# Altium PCB Therm_Expand_PCB_BottomBoard.PcbDoc (part 1 of 2)
Units mil, origin at the board's own origin, x right, y up, seen from the top; angles counter-clockwise.
Board outline 2696 x 1978 mil, 2 copper layers (Top Layer, Bottom Layer); 37 components, 59 nets, 206 pads, 124 vias.
Unrouted connection lines stored in the file: 20.
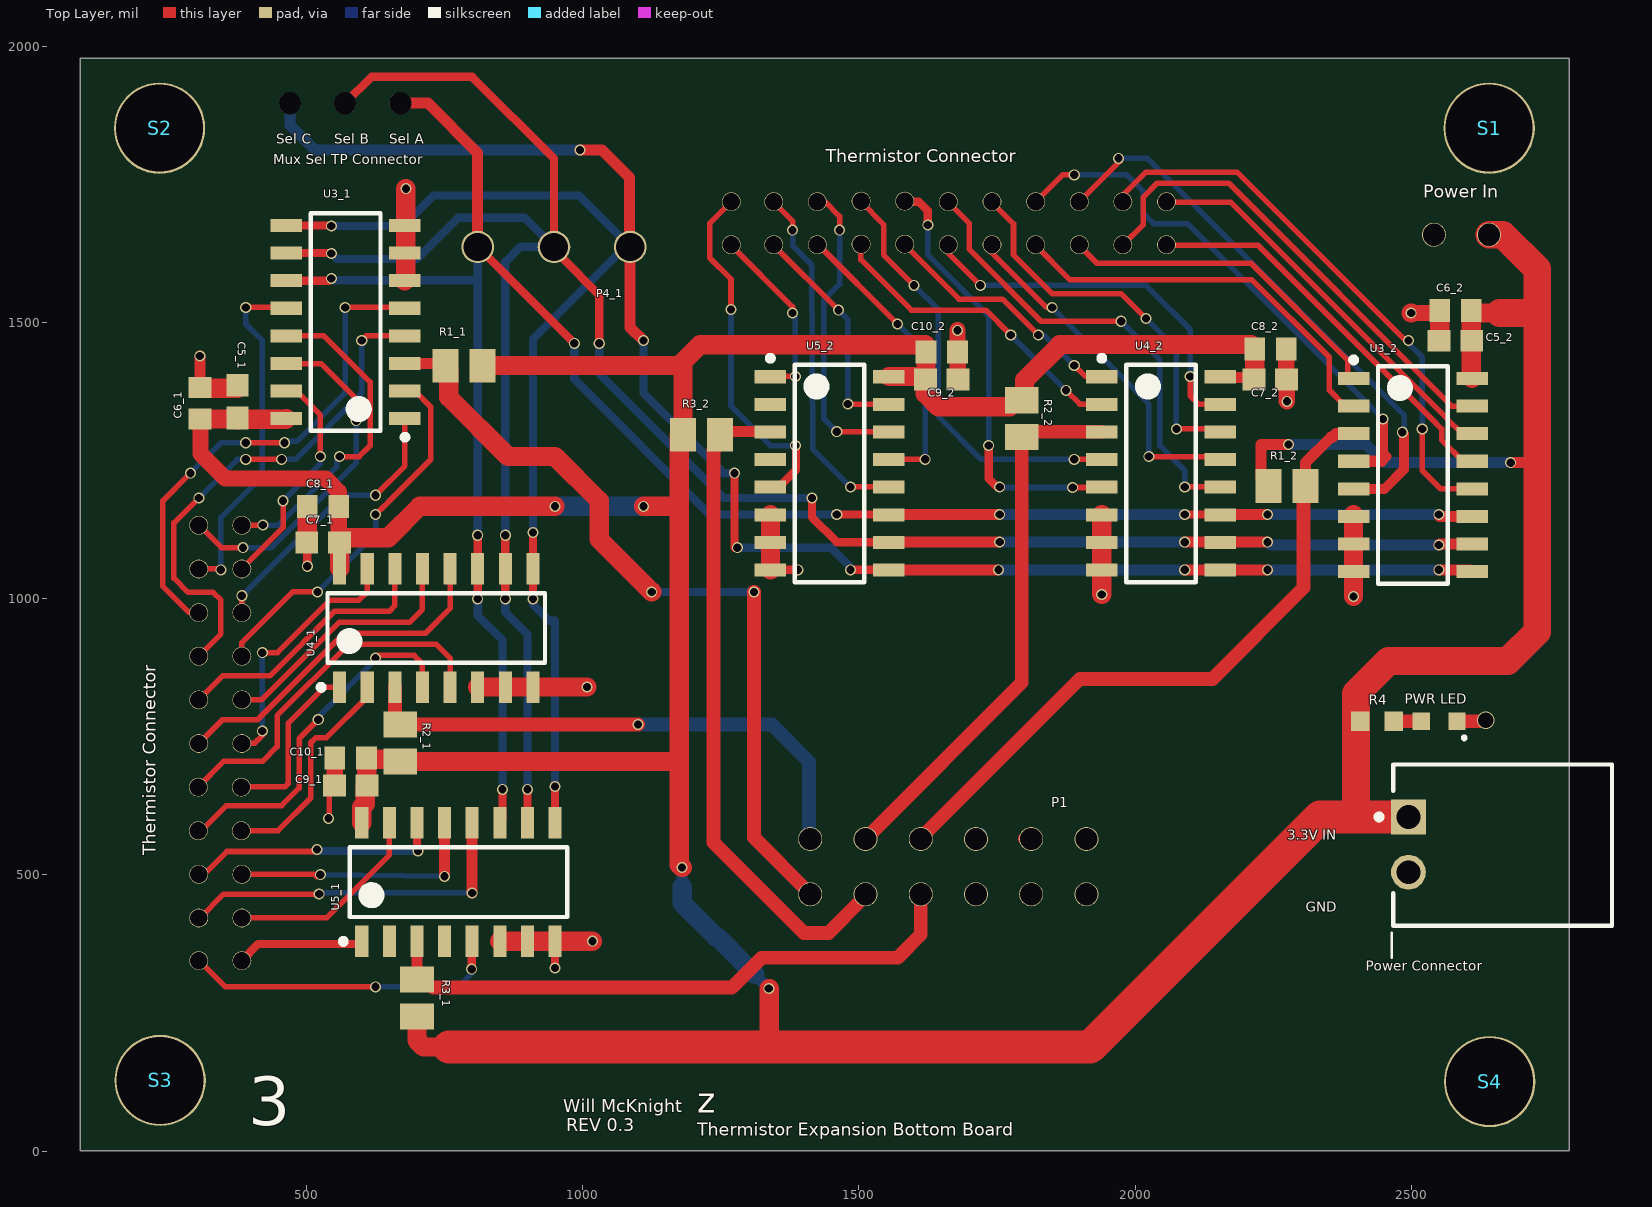
[diagram p0: Top Layer view]
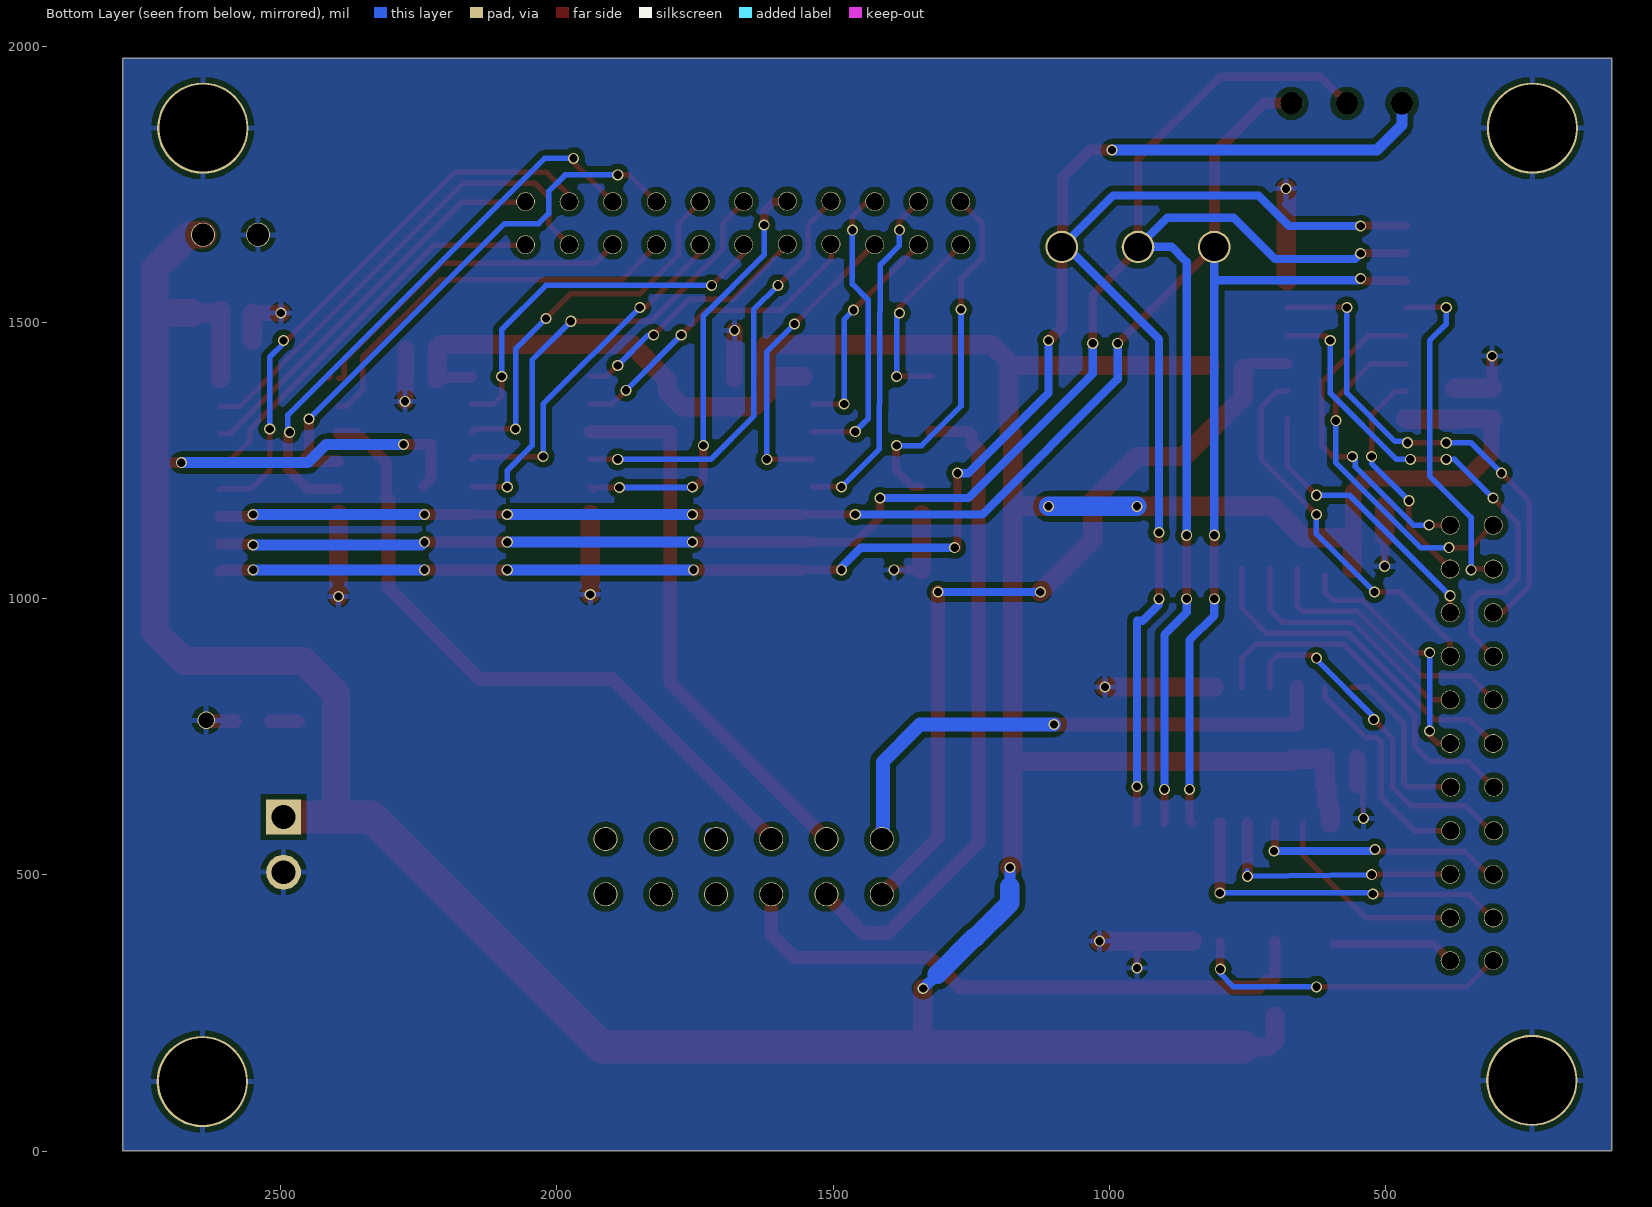
[diagram p1: Bottom Layer view, seen from below]

## Layer stack, top to bottom
Top Solder: solder mask 0.4, Solder Resist, Dk 3.5
Top Layer: signal copper 1.4
Dielectric 1: dielectric 12.6, FR-4, Dk 4.8
Bottom Layer: signal copper 1.4
Bottom Solder: solder mask 0.4, Solder Resist, Dk 3.5

## Board outline
90,1 2786,1 2786,1979 90,1979
cut-out: 2785,1977.45

## Design rules (kind name [scope] priority, off if disabled: settings)
Clearance [All] p1: gap=10 ignorepadtopadclearanceinfootprint=FALSE except(0: Arc-Hole Track-Hole SMDPad-Hole THPad-Hole Via-Hole Fill-Hole Poly-Hole Region-Hole Text-Hole; 5: Arc-Via Track-Via THPad-THPad; 6: Arc-Arc Arc-Track Track-Track)
PolygonConnect [All] p1: connectstyle=Relief reliefconductorwidth=10 reliefentries=4 polygonreliefangle="90 Angle" airgapwidth=10
RoutingVias [All] p1: holewidth=15 width=20 viastyle="Through Hole" minholewidth=12 minwidth=18 maxholewidth=28 maxwidth=32
ShortCircuit [All] p1: allowed=TRUE
SolderMaskExpansion [All] p1: expansion=4
Width [All] p1: maxlimit=100 minlimit=6 preferedwidth=15 minimp=50.000000 maximp=50.000000 favimp=50.000000
29 further rules are at their usual default settings.

## Classes and differential pairs
channel class Multiplexers: Data_TransferA_U_Single_Mux1 Data_TransferB_U_Single_Mux2
channel class MID: Data_TransferA Data_TransferB
channel class 50Pin_Connector: Data_TransferA_U_AHK50H-ND_THERM_CONNECTOR1 Data_TransferB_U_AHK50H-ND_THERM_CONNECTOR2
net class ADC_OUTC[1..2]: ADC_OUTC1 ADC_OUTC2
net class ADC_OUTB[1..2]: ADC_OUTB1 ADC_OUTB2
net class ADC_OUTA[1..2]: ADC_OUTA1 ADC_OUTA2
component class U_Data_Conversion: P1 R4 S1 S2 S3 S4
component class Data_TransferB_U_Single_Mux2: C5_2 C6_2 C7_2 C8_2 C9_2 C10_2 R1_2 R2_2 R3_2 U3_2 U4_2 U5_2
component class Data_TransferB_U_AHK50H-ND_THERM_CONNECTOR2: P2_2
component class Data_TransferA_U_Single_Mux1: C5_1 C6_1 C7_1 C8_1 C9_1 C10_1 P4_1 R1_1 R2_1 R3_1 U3_1 U4_1 U5_1
component class Data_TransferA_U_AHK50H-ND_THERM_CONNECTOR1: P2_1

## Components (designator, comment, footprint, x,y, rotation, side; value= is the part's Value field where it differs from the comment)
C5_1 "0.1uF" "0.1UF BYPASS CAPACITOR" 375,1357 r270 top (schematic designator C5)
C5_2 "0.1uF" "0.1UF BYPASS CAPACITOR" 2580,1467 r0 top (schematic designator C5)
C6_1 "1uF" 1UF_SAMSUNG 307,1354 r270 top (schematic designator C6)
C6_2 "1uF" 1UF_SAMSUNG 2580,1522 r0 top (schematic designator C6)
C7_1 "0.1uF" "0.1UF BYPASS CAPACITOR" 530,1102 r0 top (schematic designator C7)
C7_2 "0.1uF" "0.1UF BYPASS CAPACITOR" 2245,1397 r180 top (schematic designator C7)
C8_1 "1uF" 1UF_SAMSUNG 530,1167 r0 top (schematic designator C8)
C8_2 "1uF" 1UF_SAMSUNG 2245,1452 r180 top (schematic designator C8)
C9_1 "0.1uF" "0.1UF BYPASS CAPACITOR" 580,662 r0 top (schematic designator C9)
C9_2 "0.1uF" "0.1UF BYPASS CAPACITOR" 1650,1397 r180 top (schematic designator C9)
C10_1 "1uF" 1UF_SAMSUNG 580,712 r0 top (schematic designator C10)
C10_2 "1uF" 1UF_SAMSUNG 1650,1447 r180 top (schematic designator C10)
"Mux Sel TP Connector" "3 POS Mux Select Header" "Mux Select 3 Pos Header Pin" 670,1897 r180 top
P1 "12 POS ADC Header" "12 POS Dual Header" 1412,465 r0 top
P4_1 "Mux_Sel" 3-SCREW-TERMINAL-MUX-SELECT 1120,1616 r180 top (schematic designator P4)
"Power Connector" "2Pos Power Connector" "2POS POWER CONNECTOR" 2494,554 r90 top
"Power In" "2 Pos Power Header" "2 POS Power Header" 2641,1659 r180 top (schematic designator P6)
R1_1 "6.49kOhm SMD Resistor" RESC2012X06N 785,1422 r0 top (schematic designator R1)
R1_2 "6.49kOhm SMD Resistor" RESC2012X06N 2275,1204 r180 top (schematic designator R1)
R2_1 "6.49kOhm SMD Resistor" RESC2012X06N 670,739 r270 top (schematic designator R2)
R2_2 "6.49kOhm SMD Resistor" RESC2012X06N 1795,1326 r90 top (schematic designator R2)
R3_1 "6.49kOhm SMD Resistor" RESC2012X06N 700,277 r270 top (schematic designator R3)
R3_2 "6.49kOhm SMD Resistor" RESC2012X06N 1215,1297 r180 top (schematic designator R3)
R4 "Green" Green_LED_Resistor_90.9 2438,778 r180 top
S1 "#6-32 Standoff" "#6-32 Stand Off"#1 3045,3059 r0 top
S2 "#6-32 Standoff" "#6-32 Stand Off"#2 638,3059 r0 top
S3 "#6-32 Standoff" "#6-32 Stand Off"#3 639,1335 r0 top
S4 "#6-32 Standoff" "#6-32 Stand Off"#4 3046,1333 r0 top
"Thermistor Connector" "22-Pin-Connector" "22-PIN CONENCTOR" 15074,-11843 r0 top (schematic designator P2)
"Thermistor Connector" "22-Pin-Connector" "22-PIN CONENCTOR" 13867,14150 r90 top (schematic designator P2)
U3_1 "8:1 - MUX" SOP127P600X175 571,1501 r180 top (schematic designator U3)
U3_2 "8:1 - MUX" SOP127P600X175 2503,1224 r0 top (schematic designator U3)
U4_1 "8:1 - MUX" SOP127P600X175 735,947 r90 top (schematic designator U4)
U4_2 "8:1 - MUX" SOP127P600X175 2047,1227 r0 top (schematic designator U4)
U5_1 "8:1 - MUX" SOP127P600X175 775,487 r90 top (schematic designator U5)
U5_2 "8:1 - MUX" SOP127P600X175 1447,1227 r0 top (schematic designator U5)
? "LED" GREEN_SMD_LED 2929,714 r180 top

## Footprints (in the part's own frame and the unit in brackets; to place one, negate y for a bottom-side part, rotate by r counter-clockwise, add the part's x,y. Pads: shape width x height; smd on the part's side, far side on the other; paste and mask are expansions set on the pad)
"0.1UF BYPASS CAPACITOR" [mm] "Chip Capacitor, 2-Leads, Body 1.60x0.80mm, IPC Medium Density"
  rect 1.05x1 smd: 1(-0.75,0) 2(0.75,0)
  body extent -0.87,-0.48 0.87,0.48, height 0.9
1UF_SAMSUNG [mm]
  rect 0.95x1.05 smd: 1(-0.725,0) 2(0.725,0)
  body extent -0.85,-0.45 0.85,0.45, height 0.9
"2 POS Power Header" [mm] "Connecting Power between boards"
  round 1.1 hole 1.02: 1(0,0) 2(2.54,0)
  body extent -1.54,-1.3 3.92,1.24, height 10.04
"2POS POWER CONNECTOR" [mm]
  rect 1.6x1.6 hole 1.09: 1(1.295,-0.025)
  round 1.6 hole 1.09: 2(-1.245,-0.025)
  silkscreen extent -3.71,-9.38 3.71,1.45, body extent -3.66,-12.91 3.71,0.67, height 6.98
3-SCREW-TERMINAL-MUX-SELECT [mm]
  round 1.5 hole 1.3: 1(0.864,-0.533) 2(4.369,-0.533) 3(7.874,-0.533)
  body extent -1.43,-4.08 10.07,2.92, height 8.5
"12 POS Dual Header" [mm] "Board to Board ADC Channel Header"
  round 1.1 hole 1.02: 1(0,0) 2(0,2.54) 3(2.54,2.54) 4(2.54,0) 5(5.08,0) 6(5.08,2.54) 7(7.62,2.54) 8(7.62,0) 9(10.16,0) 10(10.16,2.54) 11(12.7,2.54) 12(12.7,0)
  body extent -1.27,-3.18 13.97,4.7, height 20.46
"22-PIN CONENCTOR" [mil]
  round 34 hole 31.5: 1(-13017,13484) 2(-13017,13562) 3(-13096,13484) 4(-13096,13562) 5(-13175,13484) 6(-13175,13562) 7(-13254,13484) 8(-13254,13562) 9(-13333,13484) 10(-13333,13562) 11(-13412,13484) 12(-13412,13562) 13(-13491,13485) 14(-13491,13563) 15(-13570,13485) 16(-13570,13563) 17(-13649,13484) 18(-13649,13562) 19(-13728,13484) 20(-13728,13562) 22(-13805,13562) 51(-13805,13484)
  body extent -13883,13472 -12939,13866, height 199
"#6-32 Stand Off"#1 [mm]
  round 4.2 hole 4: S1(-10.262,-30.658)
  body extent -13.92,-33.83 -6.6,-27.48, height 10.32
"#6-32 Stand Off"#2 [mm]
  round 4.2 hole 4: S2(-10.262,-30.658)
  body extent -13.92,-33.83 -6.6,-27.48, height 10.32
"#6-32 Stand Off"#3 [mm]
  round 4.2 hole 4: S3(-10.262,-30.658)
  body extent -13.92,-33.83 -6.6,-27.48, height 10.32
"#6-32 Stand Off"#4 [mm]
  round 4.2 hole 4: S4(-10.262,-30.658)
  body extent -13.92,-33.83 -6.6,-27.48, height 10.32
Green_LED_Resistor_90.9 [mm]
  rect 0.85x0.9 smd: 1(-0.775,0) 2(0.775,0)
  body extent -0.85,-0.45 0.85,0.45, height 0.55
GREEN_SMD_LED [mil]
  rect 31.5x31.5 smd: 1(346,-64) 2(411,-64)
  silkscreen extent 332,-35 334,-33, body extent 346,-79 410,-48, height 28
"Mux Select 3 Pos Header Pin" [mm]
  round 1 hole 1.02: 1(0,0) 2(2.54,0) 3(5.08,0)
  body extent -1.19,-7.26 6.43,1.24, height 5.77
RESC2012X06N [mm] "Chip Resistor, 2-Leads, Body 2.00x1.25mm, IPC Medium Density"
  rect 1.2x1.55 smd: 1(-0.85,0) 2(0.85,0)
  body extent -1.1,-0.58 1.1,0.58, height 0.6
SOP127P600X175 [mm] "SOP, 16-Leads, Body 9.90x3.90mm, Pitch 1.27mm, IPC Medium Density"
  rect 1.45x0.6 smd: 1(-2.725,4.445) 2(-2.725,3.175) 3(-2.725,1.905) 4(-2.725,0.635) 5(-2.725,-0.635) 6(-2.725,-1.905) 7(-2.725,-3.175) 8(-2.725,-4.445) 9(2.725,-4.445) 10(2.725,-3.175) 11(2.725,-1.905) 12(2.725,-0.635) 13(2.725,0.635) 14(2.725,1.905) 15(2.725,3.175) 16(2.725,4.445)
  silkscreen extent -2.85,-5 1.6,5.42, body extent -3,-5 3,5, height 1.75

## Part data
C5_1 C5_2 C7_1 C7_2 C9_1 C9_2: library part "0.1uF Cap", "0.1uF Bypass Cap", Case/Package=0603, Case Code (Metric)=1608, Dielectric=X7R, Dielectric Material=Ceramic, Manufacturer=KEMET, Manufacturer Part Number=C0603C104K9RACTU, Max Operating Temperature=125°C, Min Operating Temperature=-55°C, Package Quantity=4000, Supplier Part Number 1=399-15351-1-ND, Tolerance=10%, Voltage Rating=6.3V, Case Code (Imperial)=0603, ComponentLink1Description=https://datasheet.ciiva.com/13371/kem-c1002-x7r-smd-357932-13371879.pdf?src-supplier=Mouser, ComponentLink1URL=https://datasheet.ciiva.com/13371/kem-c1002-x7r-smd-357932-13371879.pdf?src-supplier=Mouser, Dissipation Factor=5%, Height=0.8mm, Length=1.6mm, Mount="Surface Mount", Packaging="Tape and Reel", Pricing 1="1=0.19000, 10=0.13800, 100=0.06480, 500=0.04546, 1000=0.03763 (USD)", RoHS=Yes, Stock 1=758, Supplier 1=Digi-Key, Termination=SMD/SMT, Thickness=0.034inch, Voltage Rating (DC)=6.3V, Width=0.8mm
C6_1 C6_2 C10_1 C10_2: library part "1uF Samsung Cap", "1uF Samsung Cap", Case/Package=0603, Case Code (Metric)=1608, Dielectric=X7R, Manufacturer=Samsung, Manufacturer Part Number=CL10B105KP8NNNC, Max Operating Temperature=125°C, Min Operating Temperature=-55°C, Package Quantity=1, Supplier Part Number 1=1276-1946-1-ND, Tolerance=10%, Voltage Rating=10V, Capacitance=1uF, Case Code (Imperial)=0603, ComponentLink1Description=https://media.digikey.com/pdf/Data%20Sheets/Samsung%20PDFs/CL_Series_MLCC_ds.pdf?src-supplier=Digi-Key, ComponentLink1URL=https://media.digikey.com/pdf/Data%20Sheets/Samsung%20PDFs/CL_Series_MLCC_ds.pdf?src-supplier=Digi-Key, ComponentLink2Description=http://www1.futureelectronics.com/doc/SAMSUNG/CL10B105KP8NNNC.pdf?src-supplier=Future+Electronics, ComponentLink2URL=http://www1.futureelectronics.com/doc/SAMSUNG/CL10B105KP8NNNC.pdf?src-supplier=Future+Electronics, ComponentLink3Description=https://www.verical.com/server-webapp/html/getDatasheet?partID=358410&src-supplier=Verical, ComponentLink3URL=https://www.verical.com/server-webapp/html/getDatasheet?partID=358410&src-supplier=Verical, Contact Plating=Tin, Depth=0.8mm, Height=0.8mm, Lead Free="Lead Free", Length=1.6mm, Mount="Surface Mount", Packaging="Tape and Reel", Pricing 1="1=0.1, 10=0.052, 100=0.0233, 500=0.0166, 1000=0.0131 (USD)", Radiation Hardening=No, Stock 1=10781730, Supplier 1=Digi-Key, Thickness=0.035inch, Voltage Rating (DC)=10V, Width=0.031inch
C8_1 C8_2: library part "1uF Samsung Cap", "1uF Samsung Cap", Case/Package=0603, Case Code (Metric)=1608, Dielectric=X7R, Manufacturer=Samsung, Manufacturer Part Number=CL10B105KP8NNNC, Max Operating Temperature=125°C, Min Operating Temperature=-55°C, Package Quantity=1, Supplier Part Number 1=1276-1946-1-ND, Tolerance=10%, Voltage Rating (DC)=10V, Capacitance=1uF, Case Code (Imperial)=0603, ComponentLink1Description=https://media.digikey.com/pdf/Data%20Sheets/Samsung%20PDFs/CL_Series_MLCC_ds.pdf?src-supplier=Digi-Key, ComponentLink1URL=https://media.digikey.com/pdf/Data%20Sheets/Samsung%20PDFs/CL_Series_MLCC_ds.pdf?src-supplier=Digi-Key, ComponentLink2Description=http://www1.futureelectronics.com/doc/SAMSUNG/CL10B105KP8NNNC.pdf?src-supplier=Future+Electronics, ComponentLink2URL=http://www1.futureelectronics.com/doc/SAMSUNG/CL10B105KP8NNNC.pdf?src-supplier=Future+Electronics, ComponentLink3Description=https://www.verical.com/server-webapp/html/getDatasheet?partID=358410&src-supplier=Verical, ComponentLink3URL=https://www.verical.com/server-webapp/html/getDatasheet?partID=358410&src-supplier=Verical, Contact Plating=Tin, Depth=0.8mm, Height=0.8mm, Lead Free="Lead Free", Length=1.6mm, Mount="Surface Mount", Packaging="Tape and Reel", Pricing 1="1=0.1, 10=0.052, 100=0.0233, 500=0.0166, 1000=0.0131 (USD)", Radiation Hardening=No, Stock 1=10781730, Supplier 1=Digi-Key, Thickness=0.035inch, Width=0.031inch
"Mux Sel TP Connector": Supplier Part Number 1=2057-PH1RA-03-UA-ND, Supplier 1=Digi-Key
P1: "Interboard connector for thermistors connecting to ADC", Color=Black, Manufacturer=3M, Manufacturer Part Number=929715-06-06-EU, Package Quantity=500, Supplier Part Number 1=3M156375-12-ND, ComponentLink1Description=http://www.mouser.com/ds/2/1/ts0769-35914.pdf?src-supplier=Mouser, ComponentLink1URL=http://www.mouser.com/ds/2/1/ts0769-35914.pdf?src-supplier=Mouser, ComponentLink2Description=http://components.arrow.com/part/dataview/42715320S8912076N3321?src-supplier=Arrow, ComponentLink2URL=http://components.arrow.com/part/dataview/42715320S8912076N3321?src-supplier=Arrow, ComponentLink3Description=http://multimedia.3m.com/mws/mediawebserver?66666UuZjcFSLXTtmXME5x46EVuQEcuZgVs6EVs6E666666--?src-supplier=Digi-Key, ComponentLink3URL=http://multimedia.3m.com/mws/mediawebserver?66666UuZjcFSLXTtmXME5x46EVuQEcuZgVs6EVs6E666666--?src-supplier=Digi-Key, Connector Type="Male Pin", Contact Mating Length=0.318inch, Contact Plating=Gold, Gender=Male, Mount="Through Hole", Number of Positions=12, Number of Rows=2, Packaging=Bulk, Pitch=0.1inch, Pricing 1="1=1.86000, 10=1.69000, 25=1.58600, 50=1.51720, 100=1.44820, 250=1.31024, 500=1.20680 (USD)", RoHS=Yes, Row Spacing=0.1inch, Stock 1=0, Supplier 1=Digi-Key, Termination=Solder
P4_1: library part 3-Screw-Terminal-Mux-Select, "Mux Select", Color=Blue, Current Rating=10A, Manufacturer="Wurth Electronics", Manufacturer Part Number=691103110003, Supplier Part Number 1=732-2746-ND, Voltage Rating=125V, ComponentLink1Description=http://www.farnell.com/datasheets/1442217.pdf?src-supplier=Element14, ComponentLink1URL=http://www.farnell.com/datasheets/1442217.pdf?src-supplier=Element14, Contact Material=Brass, Height=12.2mm, Housing Material=Nylon, Length=7mm, Number of Contacts=3, Number of Levels=1, Number of Positions Per Level=3, Pitch=0.138inch, Pricing 1="1=1.1, 10=0.986, 50=0.851, 100=0.762, 500=0.717, 980=0.672 (USD)", REACH SVHC=Unknown, Stock 1=617, Stripping Length=-6mm, Supplier 1=Digi-Key, Termination=Screw, Width=11.5mm, Wire/Cable Gauge=26AWG
"Power Connector": "Headers & Wire Housings R/A HDR 2P low profile single", Color=Black, Contact Resistance=30mR, Current Rating=3A, Flammability Rating="UL94 V-0", Insulation Resistance=1GR, Manufacturer=Molex, Manufacturer Part Number=70553-0001, Max Operating Temperature=105°C, Min Operating Temperature=-40°C, Package Quantity=2880, Supplier Part Number 1=WM4900-ND, Voltage Rating=250V, Approvals=UL, ComponentLink1Description=https://datasheet.ciiva.com/5158/0705530001-pcb-headers-172944-5158768.pdf?src-supplier=Mouser, ComponentLink1URL=https://datasheet.ciiva.com/5158/0705530001-pcb-headers-172944-5158768.pdf?src-supplier=Mouser, ComponentLink2Description=https://datasheet.ciiva.com/11746/0900766b80d8d649-11746625.pdf?src-supplier=RSComponents, ComponentLink2URL=https://datasheet.ciiva.com/11746/0900766b80d8d649-11746625.pdf?src-supplier=RSComponents, ComponentLink3Description=https://datasheet.ciiva.com/16657/0705530001-pcb-headers-16657777.pdf?src-supplier=Avnet+Europe, ComponentLink3URL=https://datasheet.ciiva.com/16657/0705530001-pcb-headers-16657777.pdf?src-supplier=Avnet+Europe, ComponentLink4Description=https://datasheet.ciiva.com/7920/ps-70541-7920854.pdf?src-supplier=Element14, ComponentLink4URL=https://datasheet.ciiva.com/7920/ps-70541-7920854.pdf?src-supplier=Element14, ComponentLink5Description=https://datasheet.ciiva.com/30195/179180705530001-pcb-headers-30195548.pdf?src-supplier=Onlinecomponents.com, ComponentLink5URL=https://datasheet.ciiva.com/30195/179180705530001-pcb-headers-30195548.pdf?src-supplier=Onlinecomponents.com, ComponentLink6Description=https://datasheet.ciiva.com/1438/1887076-1438989.pdf?src-supplier=Element14, ComponentLink6URL=https://datasheet.ciiva.com/1438/1887076-1438989.pdf?src-supplier=Element14, ComponentLink7Description=https://datasheet.ciiva.com/10090/0705530001-pcb-headers-10090317.pdf?src-supplier=Avnet, ComponentLink7URL=https://datasheet.ciiva.com/10090/0705530001-pcb-headers-10090317.pdf?src-supplier=Avnet, Contact Material=Bronze, Contact Plating=Gold, ELV=Compliant, Gender=Male, Glow Wire Compliant=Non-compliant, Housing Color=Black, Housing Material=Thermoplastic, Lead Free="Lead Free", Material=Brass, Mount="Through Hole", Number of Circuits=2, Number of Contacts=2, Number of Positions=2, Number of Rows=1, Orientation="Right Angle", Packaging=Rail/Tube, Pitch=2.54mm, Pricing 1="1=0.71000, 72=0.53486, 144=0.51264, 504=0.44575, 1008=0.36775, 5040=0.32318, 10008=0.30089 (USD)", Radiation Hardening=No, REACH SVHC=Unknown, RoHS=Yes, Stock 1=8671, Supplier 1=Digi-Key, Termination="Through Hole", Voltage Rating (DC)=250V
"Power In": Color=Black, Current Rating=2.5A, Manufacturer=3M, Manufacturer Part Number=929715-06-01-EU, Max Operating Temperature=105°C, Min Operating Temperature=-40°C, Package Quantity=1000, Supplier Part Number 1=3M156375-02-ND, ComponentLink1Description=https://datasheet.ciiva.com/5147/ts0769-35914-5147696.pdf?src-supplier=Mouser, ComponentLink1URL=https://datasheet.ciiva.com/5147/ts0769-35914-5147696.pdf?src-supplier=Mouser, ComponentLink2Description=https://datasheet.ciiva.com/6818/ts0769-6818155.pdf?src-supplier=Digi-Key, ComponentLink2URL=https://datasheet.ciiva.com/6818/ts0769-6818155.pdf?src-supplier=Digi-Key, Connector Type="Male Pin", Contact Gender=Male, Contact Material="Copper Alloy", Contact Mating Length=0.318inch, Contact Plating=Gold, Gender=Male, Housing Material=Polycyclohexylenedimethylene, Mount="Through Hole", Number of Positions=2, Number of Rows=2, Packaging=Bulk, Pitch=2.54mm, Pricing 1="1=0.43000, 10=0.40200, 25=0.34480, 50=0.29300, 100=0.28160, 250=0.25284, 500=0.24136 (USD)", RoHS=Yes, Row Spacing=0.1inch, Stock 1=0, Supplier 1=Digi-Key, Termination=Solder
R1_1 R1_2 R2_1 R2_2 R3_1 R3_2: Case/Package=0805, Case Code (Metric)=2012, Manufacturer=Panasonic, Manufacturer Part Number=ERA6AEB6491V, Max Operating Temperature=155°C, Max Power Dissipation=125mW, Min Operating Temperature=-55°C, Package Quantity=1, Resistance=6.49K, Supplier Part Number 1=P6.49KDACT-ND, Temperature Coefficient=25ppm/°C, Tolerance=0.1%, Voltage Rating=100V, Case Code (Imperial)=0805, ComponentLink1Description=http://www.farnell.com/datasheets/485442.pdf?src-supplier=Farnell, ComponentLink1URL=http://www.farnell.com/datasheets/485442.pdf?src-supplier=Farnell, ComponentLink2Description=http://www.mouser.com/ds/2/315/AOA0000CE26-32660.pdf?src-supplier=Mouser, ComponentLink2URL=http://www.mouser.com/ds/2/315/AOA0000CE26-32660.pdf?src-supplier=Mouser, ComponentLink3Description=http://www.farnell.com/datasheets/2059650.pdf?src-supplier=Farnell, ComponentLink3URL=http://www.farnell.com/datasheets/2059650.pdf?src-supplier=Farnell, ComponentLink4Description=http://uk.rs-online.com/webdocs/0eb1/0900766b80eb1d8c.pdf?src-supplier=RSComponents, ComponentLink4URL=http://uk.rs-online.com/webdocs/0eb1/0900766b80eb1d8c.pdf?src-supplier=RSComponents, ComponentLink5Description=http://www.farnell.com/datasheets/485442.pdf?src-supplier=Element14, ComponentLink5URL=http://www.farnell.com/datasheets/485442.pdf?src-supplier=Element14, ComponentLink6Description=http://www.produktinfo.conrad.com/datenblaetter/1100000-1199999/001181295-da-01-en-WIDERSTAND_ERA_0805_6K49_0_1__5000ST.pdf?src-supplier=Conrad, ComponentLink6URL=http://www.produktinfo.conrad.com/datenblaetter/1100000-1199999/001181295-da-01-en-WIDERSTAND_ERA_0805_6K49_0_1__5000ST.pdf?src-supplier=Conrad, Composition="Thin Film,Metal Film", Contact Plating=Tin, Depth=1.25mm, Features="Automotive AEC-Q200", Height=0.5mm, Lead Free="Lead Free", Length=2mm, Military Standard=Not, Mount="Surface Mount", Number of Pins=2, Number of Terminations=2, Packaging="Tape and Reel", Power Rating=125mW, Pricing 1="1=0.36, 10=0.302, 100=0.1182, 1000=0.0495, 2500=0.0454 (USD)", Radiation Hardening=No, REACH SVHC="No SVHC", Stock 1=15147, Supplier 1=Digi-Key, Termination=SMD/SMT, Voltage Rating (DC)=100V, Width=1.25mm
R4: library part Green_LED_Res, Case/Package=0201, Case Code (Metric)=0603, Manufacturer=Panasonic, Manufacturer Part Number=ERJ-1GNF90R9C, Max Operating Temperature=125°C, Max Power Dissipation=50mW, Min Operating Temperature=-55°C, Package Quantity=15000, Resistance=90.9R, Supplier Part Number 1=311-90.9HRCT-ND, Temperature Coefficient=200ppm/°C, Tolerance=1%, Voltage Rating=25V, Voltage Rating (DC)=50V, Case Code (Imperial)=0201, ComponentLink1Description=https://datasheet.ciiva.com/15189/getdatasheetpartid-326528-15189836.pdf?src-supplier=Verical, ComponentLink1URL=https://datasheet.ciiva.com/15189/getdatasheetpartid-326528-15189836.pdf?src-supplier=Verical, ComponentLink2Description=https://datasheet.ciiva.com/12558/rc0603-272842-12558285.pdf?src-supplier=Mouser, ComponentLink2URL=https://datasheet.ciiva.com/12558/rc0603-272842-12558285.pdf?src-supplier=Mouser, Composition="Thick Film", Contact Plating=Tin,Matte, Depth=0.8mm, Height=0.01inch, Lead Free="Lead Free", Length=0.024inch, Military Standard=Not, Mount="Surface Mount", Number of Terminations=2, Packaging="Tape and Reel", Power Rating=50mW, Pricing 1="1=0.10000, 10=0.02400, 100=0.00970, 1000=0.00437, 2500=0.00379 (USD)", Radiation Hardening=No, RoHS=Yes, Stock 1=401780, Supplier 1=Digi-Key, Termination=SMD/SMT, Width=0.3mm
S1 S2 S3 S4: "Hex Standoff for Thermistor Boards", Manufacturer=RAF, Manufacturer Part Number=2102T-632-AL-7, Package Quantity=100, Supplier Part Number 1=1772-1144-ND, Pricing 1="1=0.5, 25=0.3328, 100=0.2834, 250=0.2692, 500=0.2551, 1000=0.2409 (USD)", Stock 1=1687, Supplier 1=Digi-Key
"Thermistor Connector" "Thermistor Connector": Color=Black, Contact Resistance=30mR, Current Rating=2A, Manufacturer=Hirose, Manufacturer Part Number=DF11-22DP-2DS(24), Max Operating Temperature=85°C, Min Operating Temperature=-30°C, Package Quantity=20, Supplier Part Number 1=H10253-ND, Voltage Rating=250V, ComponentLink1Description=http://docs-usa.electrocomponents.com/techlib:/itc_doclist_US.htm?stockno=6888963&src-supplier=Allied+Electronics, ComponentLink1URL=http://docs-usa.electrocomponents.com/techlib:/itc_doclist_US.htm?stockno=6888963&src-supplier=Allied+Electronics, ComponentLink2Description=https://www.verical.com/server-webapp/html/getDatasheet?partID=456315&src-supplier=Verical, ComponentLink2URL=https://www.verical.com/server-webapp/html/getDatasheet?partID=456315&src-supplier=Verical, ComponentLink3Description=http://www.hirose.co.jp/cataloge_hp/en_DF11_20130411.pdf?src-supplier=Future+Electronics, ComponentLink3URL=http://www.hirose.co.jp/cataloge_hp/en_DF11_20130411.pdf?src-supplier=Future+Electronics, ComponentLink4Description=http://www.farnell.com/datasheets/91550.pdf?src-supplier=Element14, ComponentLink4URL=http://www.farnell.com/datasheets/91550.pdf?src-supplier=Element14, ComponentLink5Description=http://www.mouser.com/ds/2/185/DF11_catalog-1064296.pdf?src-supplier=Mouser, ComponentLink5URL=http://www.mouser.com/ds/2/185/DF11_catalog-1064296.pdf?src-supplier=Mouser, ComponentLink6Description=http://documents.rs-components.com/techlib://itc_doclist_GB.htm?stockno=6056598&src-supplier=RSComponents, ComponentLink6URL=http://documents.rs-components.com/techlib://itc_doclist_GB.htm?stockno=6056598&src-supplier=RSComponents, Connector Type="Male Pin", Contact Material="Brass,Copper Alloy,Tin", Contact Mating Length=0.118inch, Contact Plating=Tin, Depth=10mm, Fastening Type=Detent, Gender=Male, Height=5mm, Housing Color=Black, Housing Material=Polyamide, Lead Free="Lead Free", Length=24mm, Max Current Rating=2A, Mount="Through Hole", Number of Contacts=22, Number of Positions=22, Number of Rows=2, Orientation="Right Angle", Packaging=Rail/Tube, Pitch=2mm, Pricing 1="1=1.19, 20=1.0455, 100=0.902, 500=0.738, 1000=0.656 (USD)", Radiation Hardening=No, Row Spacing=0.079inch, Stock 1=536, Supplier 1=Digi-Key, System=Connector, Termination=Solder
U3_1 U3_2 U4_1 U4_2 U5_1 U5_2: Case/Package=TSSOP, High Level Output Current=25mA, Manufacturer="Texas Instruments", Manufacturer Part Number=SN74LV4051ATPWRQ1, Max Operating Temperature=105°C, Max Supply Voltage=5.5V, Min Operating Temperature=-40°C, Min Supply Voltage=2V, On-State Resistance=75R, Operating Supply Current=20uA, Package Quantity=1, Supplier Part Number 1=296-19260-1-ND, Bandwidth=35MHz, ComponentLink1Description=http://www.ti.com/lit/ds/symlink/sn74lv4051a-q1.pdf?src-supplier=Digi-Key, ComponentLink1URL=http://www.ti.com/lit/ds/symlink/sn74lv4051a-q1.pdf?src-supplier=Digi-Key, ComponentLink2Description=http://www.ti.com/lit/gpn/sn74lv4051a-q1?src-supplier=Mouser, ComponentLink2URL=http://www.ti.com/lit/gpn/sn74lv4051a-q1?src-supplier=Mouser, ComponentLink3Description=https://www.verical.com/server-webapp/html/getDatasheet?partID=137249&src-supplier=Verical, ComponentLink3URL=https://www.verical.com/server-webapp/html/getDatasheet?partID=137249&src-supplier=Verical, ComponentLink4Description=http://focus.ti.com/lit/ds/symlink/sn74lv4051a-q1.pdf?src-supplier=Avnet, ComponentLink4URL=http://focus.ti.com/lit/ds/symlink/sn74lv4051a-q1.pdf?src-supplier=Avnet, ComponentLink5Description=http://www.produktinfo.conrad.com/datenblaetter/1100000-1199999/001187277-da-01-en-IC_MUX_DE_SN74LV4051ATPWRQ1_TSSOP_16_TID.pdf?src-supplier=Conrad, ComponentLink5URL=http://www.produktinfo.conrad.com/datenblaetter/1100000-1199999/001187277-da-01-en-IC_MUX_DE_SN74LV4051ATPWRQ1_TSSOP_16_TID.pdf?src-supplier=Conrad, Contact Plating=Gold, Lead Free="Lead Free", Logic Function=Multiplexer,Demultiplexer, Low Level Output Current=25mA, Mount="Surface Mount", Number of Bits=8, Number of Channels=1, Number of Circuits=1, Number of Inputs=8, Number of Outputs=1, Number of Pins=16, Packaging="Tape and Reel", Pricing 1="1=0.73, 10=0.646, 100=0.4951, 500=0.3914, 1000=0.3131 (USD)", Propagation Delay=7ns, Radiation Hardening=No, REACH SVHC="No SVHC", Stock 1=41099, Supplier 1=Digi-Key, Supply Type=Single, Turn-Off Delay Time=20ns, Turn-On Delay Time=20ns, Weight=0.002169oz
?: library part GREEN_LED, Case/Package=0603, Case Code (Metric)=1608, Color=Green, Forward Current=20mA, Forward Voltage=2V, Lens Color=Colorless,Clear, Manufacturer=Dialight, Manufacturer Part Number=5988070107F, Max Operating Temperature=100°C, Min Operating Temperature=-30°C, Package Quantity=4000, Power Dissipation=60mW, Reverse Voltage=5V, Supplier Part Number 1=350-2035-1-ND, Case Code (Imperial)=0603, ComponentLink1Description=http://www.mouser.com/ds/2/109/SMT_selector_guide-267443.pdf?src-supplier=Mouser, ComponentLink1URL=http://www.mouser.com/ds/2/109/SMT_selector_guide-267443.pdf?src-supplier=Mouser, ComponentLink2Description=http://uk.rs-online.com/webdocs/0ae2/0900766b80ae2975.pdf?src-supplier=RSComponents, ComponentLink2URL=http://uk.rs-online.com/webdocs/0ae2/0900766b80ae2975.pdf?src-supplier=RSComponents, ComponentLink3Description=http://www.farnell.com/datasheets/1720200.pdf?src-supplier=Element14, ComponentLink3URL=http://www.farnell.com/datasheets/1720200.pdf?src-supplier=Element14, ComponentLink4Description=https://media.digikey.com/pdf/Data%20Sheets/Dialight%20PDFs/598_Series_0603_Pkg.pdf?src-supplier=Digi-Key, ComponentLink4URL=https://media.digikey.com/pdf/Data%20Sheets/Dialight%20PDFs/598_Series_0603_Pkg.pdf?src-supplier=Digi-Key, ComponentLink5Description=http://www.farnell.com/datasheets/1484480.pdf?src-supplier=Element14, ComponentLink5URL=http://www.farnell.com/datasheets/1484480.pdf?src-supplier=Element14, ComponentLink6Description=https://www.alliedelec.com/m/d/745256ca487aea7b70ea31e2d673d5bb.pdf?src-supplier=Allied+Electronics, ComponentLink6URL=https://www.alliedelec.com/m/d/745256ca487aea7b70ea31e2d673d5bb.pdf?src-supplier=Allied+Electronics, ComponentLink7Description=http://www.onlinecomponents.com/productFiles/mf-DIA/mdei5980603.pdf?src-supplier=Onlinecomponents.com, ComponentLink7URL=http://www.onlinecomponents.com/productFiles/mf-DIA/mdei5980603.pdf?src-supplier=Onlinecomponents.com, ComponentLink8Description=https://www.verical.com/server-webapp/html/getDatasheet?partID=146438&src-supplier=Verical, ComponentLink8URL=https://www.verical.com/server-webapp/html/getDatasheet?partID=146438&src-supplier=Verical, ComponentLink9Description=http://www.dialight.com/Assets/Brochures_And_Catalogs/Indication/SMT_selector_guide.pdf?src-supplier=Future+Electronics, ComponentLink9URL=http://www.dialight.com/Assets/Brochures_And_Catalogs/Indication/SMT_selector_guide.pdf?src-supplier=Future+Electronics, Depth=0.8mm, Dominant Wavelength=568nm, Height=0.7mm, Illumination Color=Green, Lead Free="Lead Free", Length=1.6mm, Lens Size=0.8mm, Lens Style=Flat,Rectangular,Diffused,Colorless,Clear, Lens Transparency=Clear, Luminous Intensity=20mcd, Mount="Surface Mount", Number of Elements=1, Number of LEDs=1, Number of Pins=2, Packaging="Tape and Reel", Pricing 1="1=0.46, 10=0.33, 25=0.2528, 100=0.1648, 250=0.1209, 500=0.1026, 1000=0.0843 (USD)", Radiation Hardening=No, REACH SVHC="No SVHC", Stock 1=228546, Supplier 1=Digi-Key, Test Current=20mA, Viewing Angle=140°, Wavelength=570nm, Width=0.8mm

## Via types
v1: diameter 20, hole 15, Top Layer to Bottom Layer, 104 vias
v2: diameter 20, hole 15, Top Layer to Bottom Layer, tented top, 19 vias
v3: diameter 32, hole 28, Top Layer to Bottom Layer, tented top, 1 vias

## Nets (pads, with @x,y where several pads share a name; then routed paths per layer and width w, separated by ;. In a path a pad name is that pad's centre, name@x,y a point inside that pad or via, vN(x,y) a via of type N, cw(c..) or ccw(c..) an arc to the next point about the centre after c; other vN are vias at no path point)
+3.3V_AN: "Power Connector.1" "Power In.1" C5_1.2 C5_2.2 C6_1.2 C6_2.2 C7_1.2 C7_2.2 C8_1.2 C8_2.2 C9_1.2 C9_2.2 C10_1.2 C10_2.2 R1_1.2 R1_2.2 R2_1.2 R2_2.2 R3_1.2 R3_2.2 R4.2 U3_1.16 U3_2.16 U4_1.16 U4_2.16 U5_1.16 U5_2.16 | length 9236.5
  Top Layer w19.68: U4_2.16@2154.28,1402.45 2156.25,1400.48 2212.44,1400.48 C7_2.2@2215.47,1397.45
  Top Layer w20: v2(1337,294.45) v2@1338,294.45 ; 1338,185.45 1338,188.45 ; C7_2.2@2215.47,1397.45 C7_2.2@2216.46,1398.44 ; R1_2.2@2241.99,1203.99 2228,1217.99 2228,1279.45 v2(2278,1279.45) ; v2(2680,1246.45) 2728,1246.45
  Top Layer w29.53: C6_1.2 308.03,1324.43 308.03,1262.46 352.8,1217.69 404.4,1217.69 534.76,1217.69 558.54,1193.91 C8_1.2 C7_1.2@558.54,1112.45
  Top Layer w35: C6_1.2 373.46,1325.45 375,1323.91 376.04,1324.95 462.48,1324.95 U3_1.16@463.43,1325.91 ; C7_1.2@558.54,1112.45 560,1110.99 C7_1.2@560,1110.78 ; U4_1.16@560,1054.74 C7_1.2@560,1110.78 ; U5_1.16@600,594.74 600,622.45 606.36,628.81 606.36,660.27 608.54,662.45 609.53,662.45 609.03,662.95 C10_1.2@609.03,710.35 ; C10_1.2@608.54,712.45 C10_1.2 608.54,710.84 C10_1.2@609.03,710.35 ; R3_1.2@700,243.99 R3_1.2 700,200.45 712,188.45 758,188.45 ; R1_1.2@818.46,1422.45 1181.54,1422.45 ; v1(950,1167.45) 705,1167.45 648.33,1110.78 C7_1.2@560,1110.78 ; v1(1110,1167.45) 1175,1167.45 ; 1175,816 1175,705.45 ; 1175,818.99 1175,1167.45 ; R3_2.2@1175,1295.92 1175,1167.45 ; v2(1180,513.45) 1175,518.45 1175,705.45 ; R3_2.2@1181.54,1297.45 1181.54,1422.45 ; 1338,188.45 v2@1338,294.45 ; U5_2.16@1554.57,1402.45 1615.47,1402.45 C9_2.2@1620.47,1407.45 ; C10_2.2@1620.26,1459.95 1212.5,1459.95 1181.54,1428.99 1181.54,1422.45 ; C10_2.2@1621.46,1447.45 C10_2.2 1621.46,1408.44 C9_2.2@1620.47,1407.45 ; 1863.97,1459.45 1800,1395.49 1800,1374.37 1773.08,1347.45 1644.14,1347.45 1620.47,1371.12 C9_2.2 C9_2.2@1620.47,1407.45 ; 1863.97,1460.45 C8_2.2@2209.46,1460.45 ; C8_2.2@2209.46,1459.45 2216.46,1452.45 C8_2.2 C7_2.2@2216.46,1398.44 ; U3_2.16@2610.02,1398.99 2608.54,1400.48 C6_2.2 2608.54,1522.45 2613.54,1517.45 2660,1517.45 ; C10_1.2@609.03,710.35 609.74,709.64 665.89,709.64 R2_1.2 750,705.52 750.08,705.45 1175,705.45
  Top Layer w50: 2400,605 2400,828.45 2459,887.45 2675,887.45 2728,940.45 2728,1246.45 2728,1517.45 ; 2641,1659 2666,1659 2728,1597 2728,1517.45 ; 2660,1517.45 2728,1517.45
  Top Layer w60: 758,188.45 1338,188.45 1918.45,188.45 2335,605 2400,605 2485,605
  Bottom Layer w20: 1180,478.45 v2(1180,513.45) ; 1242,387.45 1244,387.45 ; 1311.5,319.95 v2(1337,294.45) ; v2(2278,1279.45) 2418,1279.45 2451,1246.45 v2(2680,1246.45)
  Bottom Layer w35: v1(950,1167.45) v1(1110,1167.45) ; 1180,478.45 1180,449.45 1242,387.45 ; 1244,387.45 1311.5,319.95
ADC_OUTA1: P1.1 R1_1.1 U3_1.3 | length 1463.7
  Top Layer w20: U3_1.3@678,1425.91 748.08,1425.91 751.54,1422.45 R1_1.1@757.5,1416.49
  Top Layer w25: v1(1310,1012.45) 1310,567.45 P1.1@1412,465.45
  Top Layer w35: R1_1.1@757.5,1416.49 757.5,1364.95 865,1257.45 950,1257.45 1030,1177.45 1030,1107.45 v1(1125,1012.45)
  Bottom Layer w15: v1(1125,1012.45) v1(1310,1012.45)
ADC_OUTA2: P1.6 R1_2.1 U3_2.3 | length 1218.1
  Top Layer w20: R1_2.1@2308.92,1183.99 2308.92,1203.99 2308.92,1246.37 2355,1292.45 2357.43,1292.45 2363.97,1298.99 U3_2.3@2395.46,1298.99
  Top Layer w25: P1.6@1611.23,566.23 1900,855 2140,855 2305,1020 2305,1180.07 R1_2.1@2308.92,1183.99
ADC_OUTB1: P1.2 R2_1.1 U4_1.3 | length 985.2
  Top Layer w25: U4_1.3@660,840.17 660,772.45 R2_1.1 v2(1100,772.45)
  Bottom Layer w25: v2(1100,772.45) 1342.55,772.45 1410,705 P1.2@1410,565.45
ADC_OUTB2: P1.3 R2_2.1 U4_2.3 | length 988.9
  Top Layer w25: P1.3@1512,565.45 1795,848.45 R2_2.1@1795,1292.45 ; R2_2.1@1795,1302.45 U4_2.3@1939.71,1302.45
ADC_OUTC1: P1.5 R3_1.1 U5_1.3 | length 1100.3
  Top Layer w20: U5_1.3@700,380.17 700,310.92 715.49,310.92 R3_1.1@729.95,296.45
  Top Layer w25: R3_1.1@729.95,296.45 1270,296.45 1323.55,350 1570,350 1612,392 P1.5@1612,465.45
ADC_OUTC2: P1.4 R3_2.1 U5_2.3 | length 1201.7
  Top Layer w15: P1.4@1508,469.45 P1.4@1512,465.45
  Top Layer w20: R3_2.1@1248.46,1281.96 1248.46,1297.45 1253.46,1302.45 U5_2.3@1322.43,1302.45
  Top Layer w25: R3_2.1@1248.46,1281.96 1237,1270.5 1237,558.45 1400.45,395 1445,395 1508,458 P1.4@1508,469.45
AGND: "Power Connector.2" "Power In.2" ?.1 C5_1.1 C5_2.1 C6_1.1 C6_2.1 C7_1.1 C7_2.1 C8_1.1 C8_2.1 C9_1.1 C9_2.1 C10_1.1 C10_2.1 S1.S1 S2.S2 S3.S3 S4.S4 U3_1.6 U3_1.7 U3_1.8 U3_2.6 U3_2.7 U3_2.8 U4_1.6 U4_1.7 U4_1.8 U4_2.6 U4_2.7 U4_2.8 U5_1.6 U5_1.7 U5_1.8 U5_2.6 U5_2.7 U5_2.8 | length 1722.5
  Top Layer w10: v1(540,602.45) 540,600.37 541.46,598.91 C9_1.1@541.46,662.45 ; C10_1.1@541.46,712.45 C10_1.1@545,716
  Top Layer w15: v1(501.46,1058.91) C7_1.1@501.46,1102.45 ; v2(950,331.45) U5_1.8@950,380.17 ; U5_2.8@1340,1052.45 v1(1390,1052.45)
  Top Layer w20: C6_1.1 v1(307,1439.45) ; C7_1.1@501.46,1102.45 C7_1.1@501.46,1112.45
  Top Layer w25: ?.1@2584.55,780 2583,778.45 2633.45,778.45 v3(2635,780)
  Top Layer w29.53: C9_1.1@550.47,662.45 550.96,662.94 550.96,711.96 C10_1.1@551.46,712.45 ; v1(1678.54,1486) 1678.54,1447.45 1679.04,1446.96 1679.04,1397.94 C9_2.1@1679.53,1397.45 ; C8_2.1@2273.54,1452.45 2274.04,1451.96 2274.04,1397.94 2274.53,1397.45 2274.53,1357.92 v1(2275,1357.45) ; v1(2500,1517.45) C6_2.1@2551.46,1517.45
  Top Layer w35: C6_1.1 308.54,1381 C5_1.1@375,1381 ; C7_1.1@501.46,1112.45 C8_1.1@501.46,1167.45 ; U3_1.6@678,1575.91 680,1577.91 v1(680,1742.45) ; U4_1.6@810,840.17 860,840.17 910,840.17 v1(1007.72,840.17) ; U5_1.6@850,380.17 900,380.17 950,380.17 v1(1017.72,380.17) ; U5_2.8@1340,1052.45 1340,1102.45 U5_2.6@1340,1152.45 ; v1(1939.72,1007.74) 1939.72,1052.45 1939.72,1102.45 U4_2.6@1939.72,1152.45 ; v1(2395.46,1004.28) 2395.46,1048.99 2395.46,1098.99 2395.46,1148.99 U3_2.6@2395.46,1152.45 ; C5_2.1@2551.46,1467.45 C6_2.1@2551.46,1517.45
NetD1_2: ?.2 R4.1 | length 49.5
  Top Layer w25: R4.1@2468.51,778.45 ?.2@2518,778.45
S0_1: P4_1.3 U3_1.11 U3_2.11 U4_1.11 U4_2.11 U5_1.11 U5_2.11 | length 3451.2
  Top Layer w15: U3_1.11@463.43,1575.91 540.91,1575.91 v2(545,1580) ; v2(810,1000) 810,1054.74 v2(810,1115) ; P4_1.3@810,1637.45 985,1462.45 ; U5_1.11@850,594.74 855,599.74 v2(855,655) ; 1460,1152.45 U5_2.11@1554.57,1152.45 ; 2090,1152.45 U4_2.11@2154.28,1152.45
  Top Layer w20: U5_2.11@1554.57,1152.45 1654.78,1152.45 1755,1152.45 ; U4_2.11@2154.28,1152.45 2240,1152.45 ; 2551.54,1148.99 U3_2.11@2610.02,1148.99
  Bottom Layer w15: v2(545,1580) 548.32,1576.68 808.32,1576.68 810,1575 ; v2(810,1000) 810,970 855,925 v2(855,655) ; v2(810,1115) 810,1575 ; P4_1.3@810,1637.45 810,1575 ; 985,1462.45 985,1397.45 1230,1152.45 1460,1152.45
  Bottom Layer w20: 1755,1152.45 2090,1152.45 ; 2240,1152.45 2550,1152.45
S0_2: 
S1_1: P4_1.2 U3_1.10 U3_2.10 U4_1.10 U4_2.10 U5_1.10 U5_2.10 | length 4281.4
  Top Layer w15: U3_1.10@463.43,1625.91 544.09,1625.91 v2(545,1625) ; 570,1897.45 617.55,1945 800,1945 948,1797 P4_1.2@948,1637.45 ; v2(860,1000) 860,1054.74 v2(860,1115) ; U5_1.10@900,594.74 v2(900,655) ; P4_1.2@948,1619.45 960.55,1619.45 1030,1550 1030,1462.45 ; 1415,1182.45 1415,1147.45 1460,1102.45 U5_2.10@1554.57,1102.45
  Top Layer w20: U5_2.10@1537.5,1102.95 1755,1102.95 ; 2090,1102.45 2154.28,1102.45 2240,1102.45 ; 2551.54,1098.99 U3_2.10@2610.02,1098.99
  Bottom Layer w15: v2(545,1625) 555,1615 700,1615 775,1690 895,1690 P4_1.2@947.55,1637.45 ; v2(860,1000) 860,975 900,935 v2(900,655) ; v2(860,1115) 860,1610 887.45,1637.45 P4_1.2@947.55,1637.45 ; P4_1.2@948,1637.45 P4_1.2@947.55,1637.45 ; 1030,1462.45 1030,1407.45 1255,1182.45 1415,1182.45
  Bottom Layer w20: 1755,1102.95 2089.5,1102.95 ; 2245,1097.45 2550,1097.45
S1_2: 
S2_1: P4_1.1 U3_1.9 U3_2.9 U4_1.9 U4_2.9 U5_1.9 U5_2.9 | length 3800.2
  Top Layer w15: U3_1.9@463.43,1675.91 544.09,1675.91 v2(545,1675) ; v2(910,1000) 910,1054.74 v2(910,1120) ; U5_1.9@950,594.74 v2(950,660) ; 1275,1092.45 1275,1227.45 ; 1485,1052.45 U5_2.9@1554.57,1052.45
  Top Layer w20: P4_1.1@1086,1637.45 1086,1491.45 1110,1467.45 ; U5_2.9@1554.57,1052.45 1750,1052.45 ; 2090,1052.45 2154.28,1052.45 2240,1052.45 ; 2550,1052.45 U3_2.9@2606.57,1052.45
  Bottom Layer w15: v2(545,1675) 675,1675 730,1730 993.45,1730 1086,1637.45 1077.45,1637.45 910,1470 v2(910,1120) ; v2(910,1000) 910,990 940,960 950,960 v2(950,660) ; 1110,1467.45 1110,1372.45 1255,1227.45 1275,1227.45 ; 1280,1092.45 1450,1092.45 1485,1057.45
  Bottom Layer w20: 1753,1052.45 2090,1052.45 ; 2240,1052.45 2550,1052.45
S2_2: 
TS_IN1_1: "Thermistor Connector.1"@383,1133 U3_1.13 | length 600.6
  Top Layer w10: 383,1133.45 v1(421,1133.45) ; U3_1.13@463.43,1475.91 531.54,1475.91 615,1392.45 615,1277.1 595.36,1257.45 v1(560,1257.45)
  Bottom Layer w10: v1(421,1133.45) 449,1133.45 555,1239.45 555,1252.45 v1(560,1257.45)
TS_IN1_2: "Thermistor Connector.1"@2057,1641 U3_2.13 | length 727.4
  Top Layer w10: 2056.54,1640.02 2222.79,1640.02 2545,1317.81 2545,1317.45 2555,1307.45 2555,1287.45 2593.46,1248.99 U3_2.13@2610.02,1248.99
TS_IN2_1: "Thermistor Connector.2"@305,1133 U3_1.14 | length 634.8
  Top Layer w10: 305,1133.45 346,1092.45 v1(385,1092.45) ; U3_1.14@463.43,1425.91 526.54,1425.91 590,1362.45 v1(590,1322.45)
  Bottom Layer w10: v1(385,1092.45) 436.28,1092.45 590,1246.17 v1(590,1322.45)
TS_IN2_2: "Thermistor Connector.2"@2057,1719 U3_2.14 | length 727.3
  Top Layer w10: 2056.54,1718.02 2173.07,1718.02 2565,1326.09 2565,1325.74 2591.74,1298.99 U3_2.14@2610.02,1298.99
TS_IN3_1: "Thermistor Connector.3"@383,1054 U3_1.15 | length 416.4
  Top Layer w10: 383,1054.45 457.64,1129.1 v1(457.64,1177.45) ; U3_1.15@463.43,1375.91 481.54,1375.91 525,1332.45 v1(525,1257.45)
  Bottom Layer w10: v1(457.64,1177.45) 525,1244.81 v1(525,1257.45)
TS_IN3_2: "Thermistor Connector.3"@1978,1641 U3_2.15 | length 875.3
  Top Layer w10: 1977.54,1640.02 2015,1677.48 2015,1727.19 2040.26,1752.45 2169.64,1752.45 2573.1,1348.99 U3_2.15@2610.02,1348.99
TS_IN4_1: "Thermistor Connector.4"@305,1054 U3_1.12 | length 638.4
  Top Layer w10: 305,1054.45 343,1054.45 v1(345,1052.45) ; v1(390,1527.45) 461.89,1527.45 U3_1.12@463.43,1525.91
  Bottom Layer w10: v1@345,1047.45 v1(345,1052.45) 345,1147.45 420,1222.45 420,1467.45 390,1497.45 v1(390,1527.45)
TS_IN4_2: "Thermistor Connector.4"@1978,1719 U3_2.12 | length 1024.8
  Top Layer w10: 1977.54,1718.02 1977.54,1729.99 2020,1772.45 2185,1772.45 2490,1467.45 v1(2495,1467.45) ; v1(2520,1307.45) 2520,1232.45 2553.46,1198.99 2610.02,1198.99 U3_2.12@2611.57,1197.45
  Bottom Layer w10: v1(2495,1467.45) 2495,1462.45 2520,1437.45 v1(2520,1307.45)
TS_IN5_1: "Thermistor Connector.5"@383,975 U3_1.1 | length 507.8
  Top Layer w10: 383,975.45 v1(383,1005.45) ; v1(625,1187.45) 678,1240.45 U3_1.1@678,1325.91
  Bottom Layer w10: v1(383,1005.45) 565,1187.45 v1(625,1187.45)
TS_IN5_2: "Thermistor Connector.5"@1899,1641 U3_2.1 | length 621.2
  Top Layer w10: 1898.54,1640.02 1931.11,1607.45 2210,1607.45 2385,1432.45 2385,1398.99 U3_2.1@2395.46,1398.99 ; U3_2.1@2410,1402.45 U3_2.1@2413.46,1398.99
TS_IN6_1: "Thermistor Connector.6"@305,975 U3_1.5 | length 913.9
  Top Layer w10: v1(290,1227.45) 240,1177.45 240,1022.45 287,975.45 305,975.45 ; v1@395,1282.45 v1(460,1282.45) ; v1(570,1527.45) 676.46,1527.45 U3_1.5@678,1525.91
  Bottom Layer w10: v1(290,1227.45) 345,1282.45 v1(390,1282.45) v1@395,1282.45 ; v1(460,1282.45) 462.5,1284.95 482.5,1284.95 570,1372.45 v1(570,1527.45)
TS_IN6_2: "Thermistor Connector.6"@1899,1719 U3_2.5 | length 1028
  Top Layer w10: 1898.54,1718.02 1972.98,1792.45 1970,1795.43 v1(1970,1797.45)
  Top Layer w18: U3_2.5@2395.46,1198.99 2451.54,1198.99 2487,1234.45 2487,1298.45 v1(2484,1301.45)
  Bottom Layer w10: v1(1970,1797.45) 2022.36,1797.45 2487,1332.82 2487,1305.45 2484,1302.45 v1(2484,1301.45)
TS_IN7_1: "Thermistor Connector.7"@383,896 U3_1.2 | length 678
  Top Layer w10: 383,896.45 383,920.45 475,1012.45 v1(520,1012.45) ; v1(625,1152.45) 635,1162.45 635.36,1162.45 650,1177.1 650,1177.45 725,1252.45 725,1347.45 696.54,1375.91 U3_1.2@678,1375.91
  Bottom Layer w10: v1(520,1012.45) 625,1117.45 v1(625,1152.45)
TS_IN7_2: "Thermistor Connector.7"@1820,1641 U3_2.2 | length 731.4
  Top Layer w10: 1819.54,1640.02 1882.11,1577.45 2211.72,1577.45 2351.91,1437.25 2351.91,1377.54 2380.46,1348.99 U3_2.2@2395.46,1348.99
TS_IN8_1: "Thermistor Connector.8"@305,896 U3_1.4 | length 933
  Top Layer w10: 305,896.45 345,936.45 345,997.45 330.74,1011.71 285.74,1011.71 260,1037.45 260,1137.45 v1(305,1182.45) ; v1(390,1252.45) v1(455.16,1252.45) ; v1(600,1467.45) 608.46,1475.91 U3_1.4@678,1475.91
  Bottom Layer w10: v1(305,1182.45) 375,1252.45 v1(390,1252.45) ; v1(455.16,1252.45) 480,1252.45 600,1372.45 v1(600,1467.45)
TS_IN8_2: "Thermistor Connector.8"@1820,1719 U3_2.4 | length 980
  Top Layer w10: 1819.54,1718.02 1868.98,1767.45 v1(1890,1767.45)
  Top Layer w18: 2446.54,1248.99 2455,1257.45 2449,1263.45 v1(2449,1325.45)
  Top Layer w20: U3_2.4@2395.46,1248.99 2446.54,1248.99
  Bottom Layer w10: 1900,1767.45 1985,1767.45 2015,1737.45 2015,1697.45 2033.12,1679.34 2095.12,1679.34 v1(2449,1325.45)
TS_IN9_1: "Thermistor Connector.9"@383,817 U4_1.13 | length 463.6
  Top Layer w10: 388,817.45 419.15,817.45 559.15,957.45 686.72,957.45 710,980.74 U4_1.13@710,1054.74
TS_IN9_2: "Thermistor Connector.9"@1741,1641 U4_2.13 | length 637.6
  Top Layer w10: 1740.54,1640.02 1740.54,1626.91 1840,1527.45 v1(1850,1527.45) ; v1(2025,1257.45) 2149.28,1257.45 U4_2.13@2154.28,1252.45
  Bottom Layer w10: v1(1850,1527.45) 2025,1352.45 v1(2025,1257.45)
TS_IN10_1: "Thermistor Connector.10"@305,817 U4_1.14 | length 492.7
  Top Layer w10: 305,817.45 348,860.45 433.86,860.45 550.86,977.45 650,977.45 660,987.45 U4_1.14@660,1054.74
TS_IN10_2: "Thermistor Connector.10"@1741,1719 U4_2.14 | length 703.7
  Top Layer w10: 1740.54,1718.02 1780,1678.56 1780,1622.45 1850,1552.45 1975,1552.45 v1(2020,1507.45) ; v1(2075,1307.45) 2149.28,1307.45 U4_2.14@2154.28,1302.45
  Bottom Layer w10: v1(2020,1507.45) 2075,1452.45 v1(2075,1307.45)
TS_IN11_1: "Thermistor Connector.11"@383,738 U4_1.15 | length 458.4
  Top Layer w10: 383,738.45 406,738.45 420,752.45 v1(420,760.45) ; v1(420,902.45) 447.58,902.45 542.58,997.45 595,997.45 610,1012.45 U4_1.15@610,1042.45
  Bottom Layer w10: v1(420,760.45) v1(420,902.45)
TS_IN11_2: "Thermistor Connector.11"@1662,1641 U4_2.15 | length 690.4
  Top Layer w10: 1661.54,1640.02 1661.54,1625.91 v1(1720,1567.45) ; v1(2100,1402.45) 2100,1367.45 2115,1352.45 U4_2.15@2154.28,1352.45
  Bottom Layer w10: v1(1720,1567.45) 2020,1567.45 2100,1487.45 v1(2100,1402.45)
TS_IN12_1: "Thermistor Connector.12"@305,738 U4_1.12 | length 628.4
  Top Layer w10: 305,738.45 347.55,781 410.98,781 567.43,937.45 715,937.45 760,982.45 U4_1.12 U4_1.12@760,1054.74
TS_IN12_2: "Thermistor Connector.12"@1662,1719 U4_2.12 | length 837.3
  Top Layer w10: 1661.54,1718.02 1700,1679.56 1700,1632.45 1830,1502.45 v1(1975,1502.45) ; v1@2095,1202.45 U4_2.12@2154.28,1202.45
  Bottom Layer w10: v1(1975,1502.45) 2045,1432.45 2045,1277.45 2090,1232.45 v1(2090,1202.45)
TS_IN13_1: "Thermistor Connector.13"@382,659 U4_1.1 | length 311.7
  Top Layer w10: 387,659.45 460.72,659.45 466.77,665.51 466.77,774.58 532.36,840.17 U4_1.1@560,840.17
TS_IN13_2: "Thermistor Connector.13"@1583,1642 U4_2.1 | length 456
  Top Layer w10: 1582.54,1641.02 1681.11,1542.45 1760,1542.45 v1(1825,1477.45) ; v1(1890,1422.45) 1910,1402.45 U4_2.1@1939.72,1402.45
  Bottom Layer w10: v1(1825,1477.45) 1835,1477.45 v1(1890,1422.45)
TS_IN14_1: "Thermistor Connector.14"@304,659 U4_1.5 | length 658.5
  Top Layer w10: 304,659.45 350,705.45 420,705.45 446.77,732.22 446.77,788.51 575.72,917.45 735,917.45 760,892.45 U4_1.5@760,840.17
TS_IN14_2: "Thermistor Connector.14"@1583,1720 U4_2.5 | length 796.2
  Top Layer w10: v1@1890,1201.45 1930.72,1201.45 1934.72,1197.45 U4_2.5@1939.72,1202.45
  Top Layer w15: 1582.54,1719.02 1608.43,1719.02 1625,1702.45 v1(1625,1676.56) ; v1(1735,1277.45) 1735,1217.45 1750,1202.45 v1(1755,1202.45)
  Bottom Layer w10: v1(1625,1676.56) 1625,1622.45 1735,1512.45 v1(1735,1277.45) ; v1@1755,1197.45 1759,1201.45 v1(1887,1201.45) v1@1890,1201.45
TS_IN15_1: "Thermistor Connector.15"@382,580 U4_1.2 | length 399.4
  Top Layer w10: 387,580.45 448.7,580.45 507.76,639.51 507.76,739.34 516.54,748.12 535.67,748.12 610,822.45 U4_1.2@610,840.17
TS_IN15_2: "Thermistor Connector.15"@1504,1642 U4_2.2 | length 571.6
  Top Layer w10: 1503.54,1641.02 1503.54,1613.91 1595,1522.45 1730,1522.45 v1(1775,1477.45) ; v1(1875,1377.45) 1900,1352.45 U4_2.2@1939.72,1352.45
  Bottom Layer w10: v1(1775,1477.45) v1(1875,1377.45)
TS_IN16_1: "Thermistor Connector.16"@304,580 U4_1.4 | length 642.6
  Top Layer w10: 304,580.45 310,580.45 355,625.45 455,625.45 486.77,657.22 486.77,746.63 v1(521.29,781.16) ; v1(625,892.45) 630,897.45 695,897.45 710,882.45 U4_1.4@710,840.17
  Bottom Layer w10: v1(521.29,781.16) 521.29,786.16 625,889.86 v1(625,892.45)
TS_IN16_2: "Thermistor Connector.16"@1504,1720 U4_2.4 | length 775
  Top Layer w10: 1503.54,1719.02 1545,1677.56 1545,1622.45 v1(1600,1567.45) ; v1(1890,1252.45) U4_2.4@1939.72,1252.45
  Bottom Layer w10: v1(1600,1567.45) 1644,1523.45 1644,1330.08 1721.63,1252.45 v1(1890,1252.45)
TS_IN17_1: "Thermistor Connector.17"@383,501 U5_1.13 | length 472.9
  Top Layer w10: 388,501.45 514,501.45 519,496.45 523,500.45 v1(525,500.45)
  Top Layer w20: v1(750,497.45) 750,592.74 751,593.74 U5_1.13@750,594.74
  Bottom Layer w10: v1(525,500.45) v1(750,497.45) v1@750,506.45
TS_IN17_2: "Thermistor Connector.17"@1425,1641 U5_2.13 | length 560.3
  Top Layer w10: 1424.54,1640.02 1427.43,1640.02 v1(1570,1497.45) ; U5_2.13@1537,1252.45 1615,1252.45 v1@1620,1247.45
  Bottom Layer w10: v1(1570,1497.45) 1620,1447.45 v1(1620,1252.45) v1@1620,1247.45
TS_IN18_1: "Thermistor Connector.18"@305,501 U5_1.14 | length 465
  Top Layer w10: 305,501.45 315,501.45 356,542.45 515.5,542.45 v1(519.12,546.08) ; v2@700,545.45 v2(702,543.45)
  Top Layer w15: v2@700,545.45 U5_1.14@700,594.74
  Bottom Layer w15: v1@521.75,543.45 v2(702,543.45)
TS_IN18_2: "Thermistor Connector.18"@1425,1719 U5_2.14 | length 539.6
  Top Layer w10: 1424.54,1718.02 1439.43,1718.02 1465,1692.45 v1(1465,1667.45) ; v1(1460,1302.45) U5_2.14@1537,1302.45
  Bottom Layer w10: v1(1460,1302.45) 1436.45,1326 1436.45,1541.15 1465,1569.7 v1(1465,1667.45)
TS_IN19_1: "Thermistor Connector.19"@383,422 U5_1.15 | length 367.5
  Top Layer w10: 388,422.45 536,422.45 650,536.45 U5_1.15@650,594.74
TS_IN19_2: "Thermistor Connector.19"@1346,1641 U5_2.15 | length 400.3
  Top Layer w10: 1345.54,1640.02 v1(1463.11,1522.45) ; v1(1480,1352.45) U5_2.15@1537,1352.45
  Bottom Layer w10: v1(1463.11,1522.45) 1480,1505.56 v1(1480,1352.45)
TS_IN20_1: "Thermistor Connector.20"@305,422 U5_1.12 | length 640.9
  Top Layer w10: 305,422.45 307,422.45 350,465.45 v1(523,465.45)
  Top Layer w20: v1(800,467.45) U5_1.12@800,594.74
  Bottom Layer w10: v1(523,465.45) 525,467.45 v1(800,467.45)
TS_IN20_2: "Thermistor Connector.20"@1346,1719 U5_2.12 | length 624.6
  Top Layer w10: 1345.54,1718.02 1380,1683.56 v1(1380,1667.45) ; v1(1485,1202.45) U5_2.12@1537,1202.45
  Bottom Layer w10: v1(1380,1667.45) 1380,1639.31 1414.53,1604.77 1416.42,1271.03 v1(1485,1202.45)
TS_IN21_1: "Thermistor Connector.51"@383,345 U5_1.1 | length 224.1
  Top Layer w15: 383,345.45 412.55,375 U5_1.1@594.83,375
TS_IN21_2: U5_2.1
TS_IN22_1: "Thermistor Connector.22"@305,345 U5_1.5 | length 583
  Top Layer w10: 305,345.45 353,297.45 v1(625,297.45)
  Top Layer w15: v1(799,329.45) 799,379.17 U5_1.5@800,380.17
  Bottom Layer w10: v1(625,297.45) 775,297.45 799,321.45 v1(799,329.45)
TS_IN22_2: "Thermistor Connector.22"@1269,1719 U5_2.5 | length 650.4
  Top Layer w10: v1(1268.54,1523.91) 1268.54,1578.91 1230,1617.45 1230,1679.48 1268.54,1718.02
  Top Layer w15: U5_2.5@1340,1202.45 1355.1,1202.45 1386.04,1233.39 1386.04,1276.41 v1(1385,1277.45)